# Altium PCB PCB1.PcbDoc
Units mm, origin at the board's own origin, x right, y up, seen from the top; angles counter-clockwise.
Board outline 99.95 x 99.82 mm, 2 copper layers (Top Layer, Bottom Layer); 7 components, 17 nets, 86 pads, 10 vias.
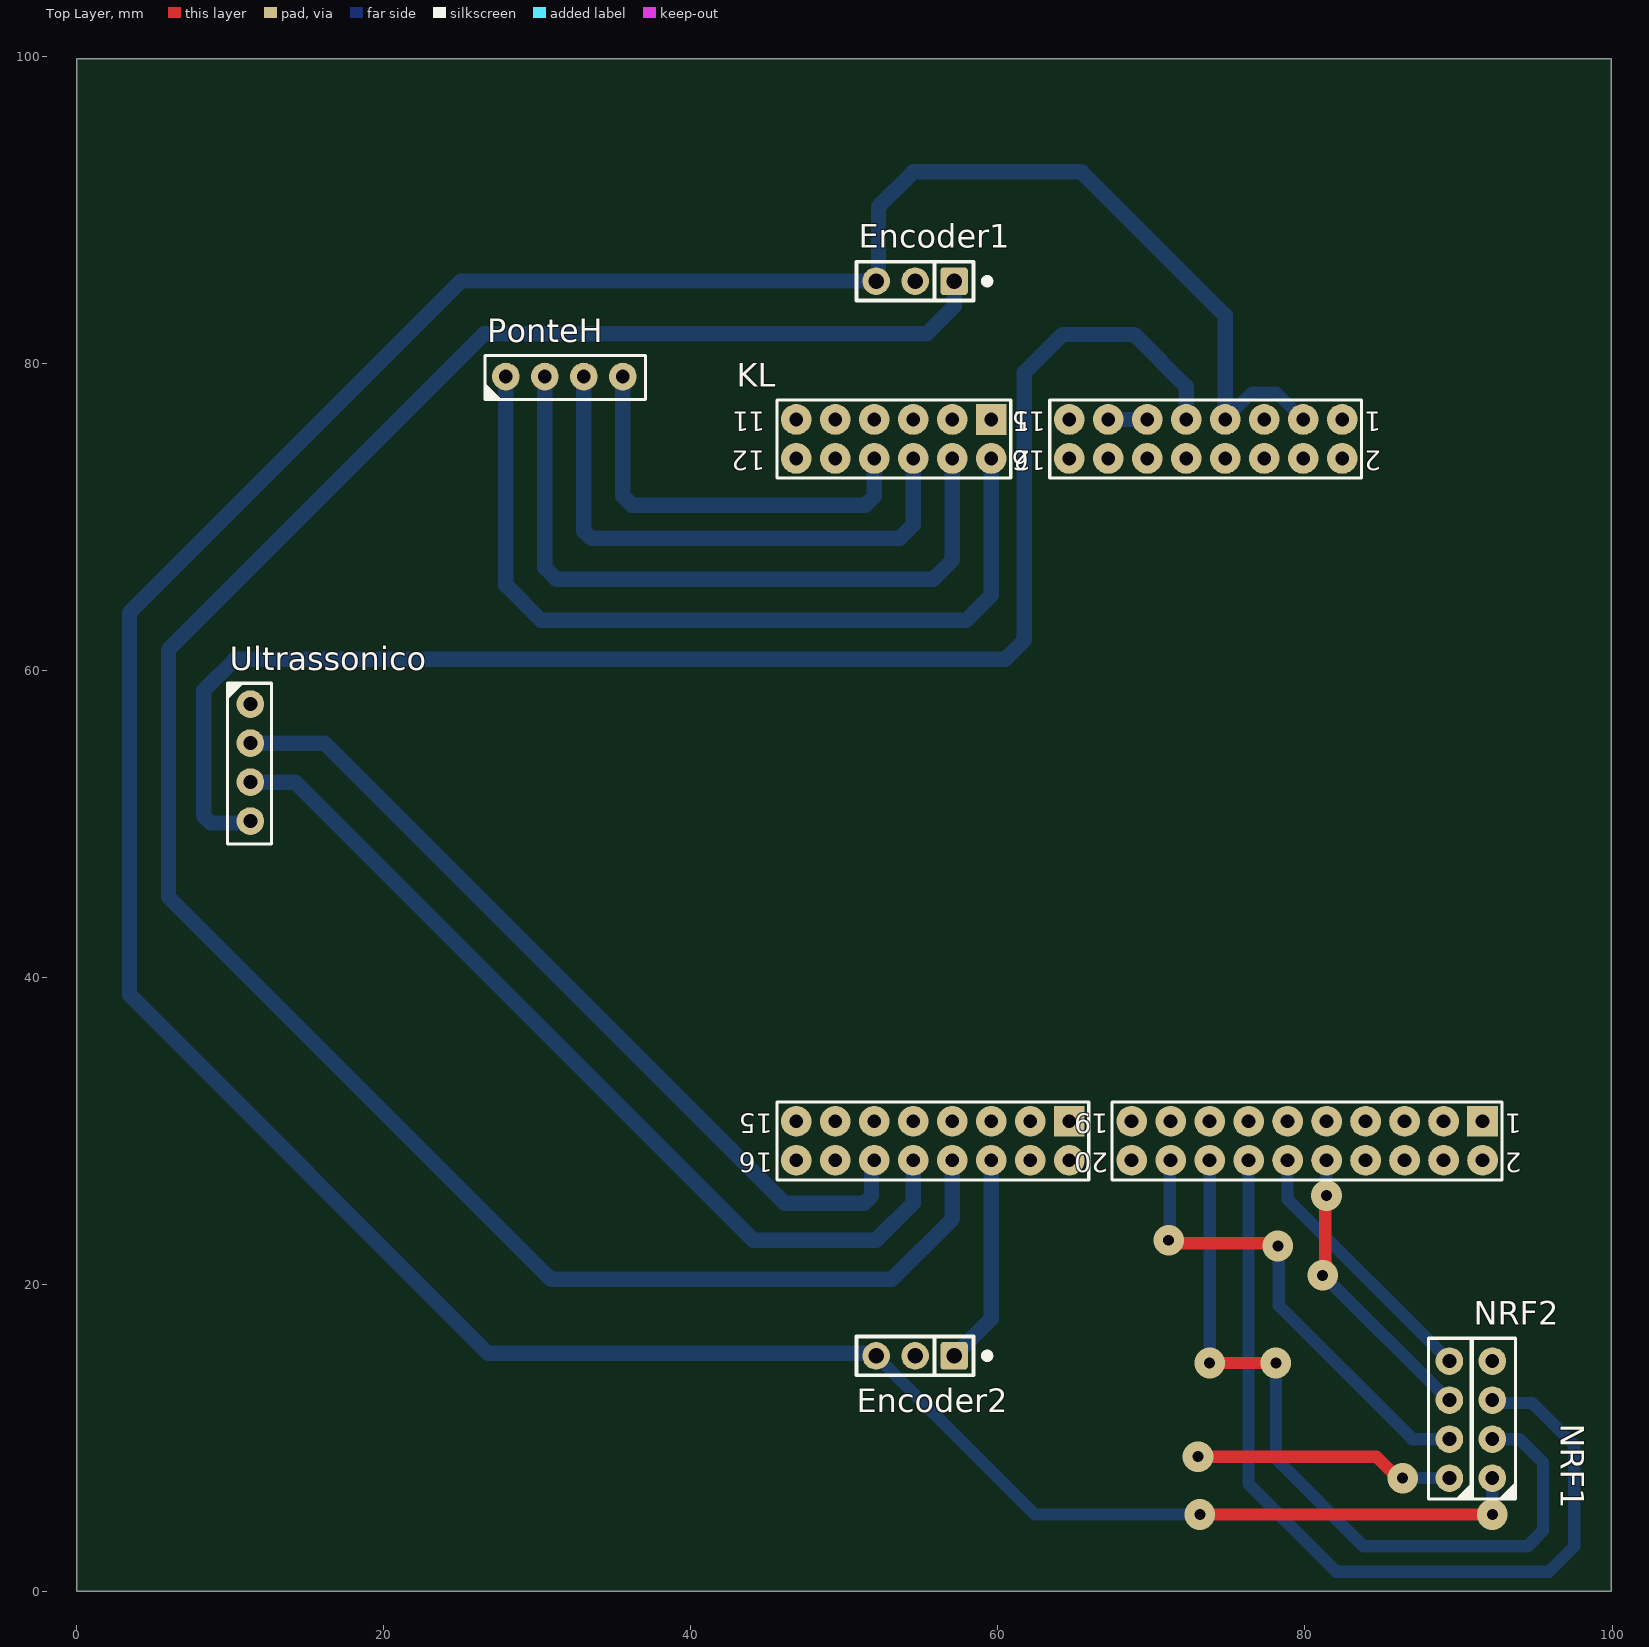
[diagram p0: Top Layer view]
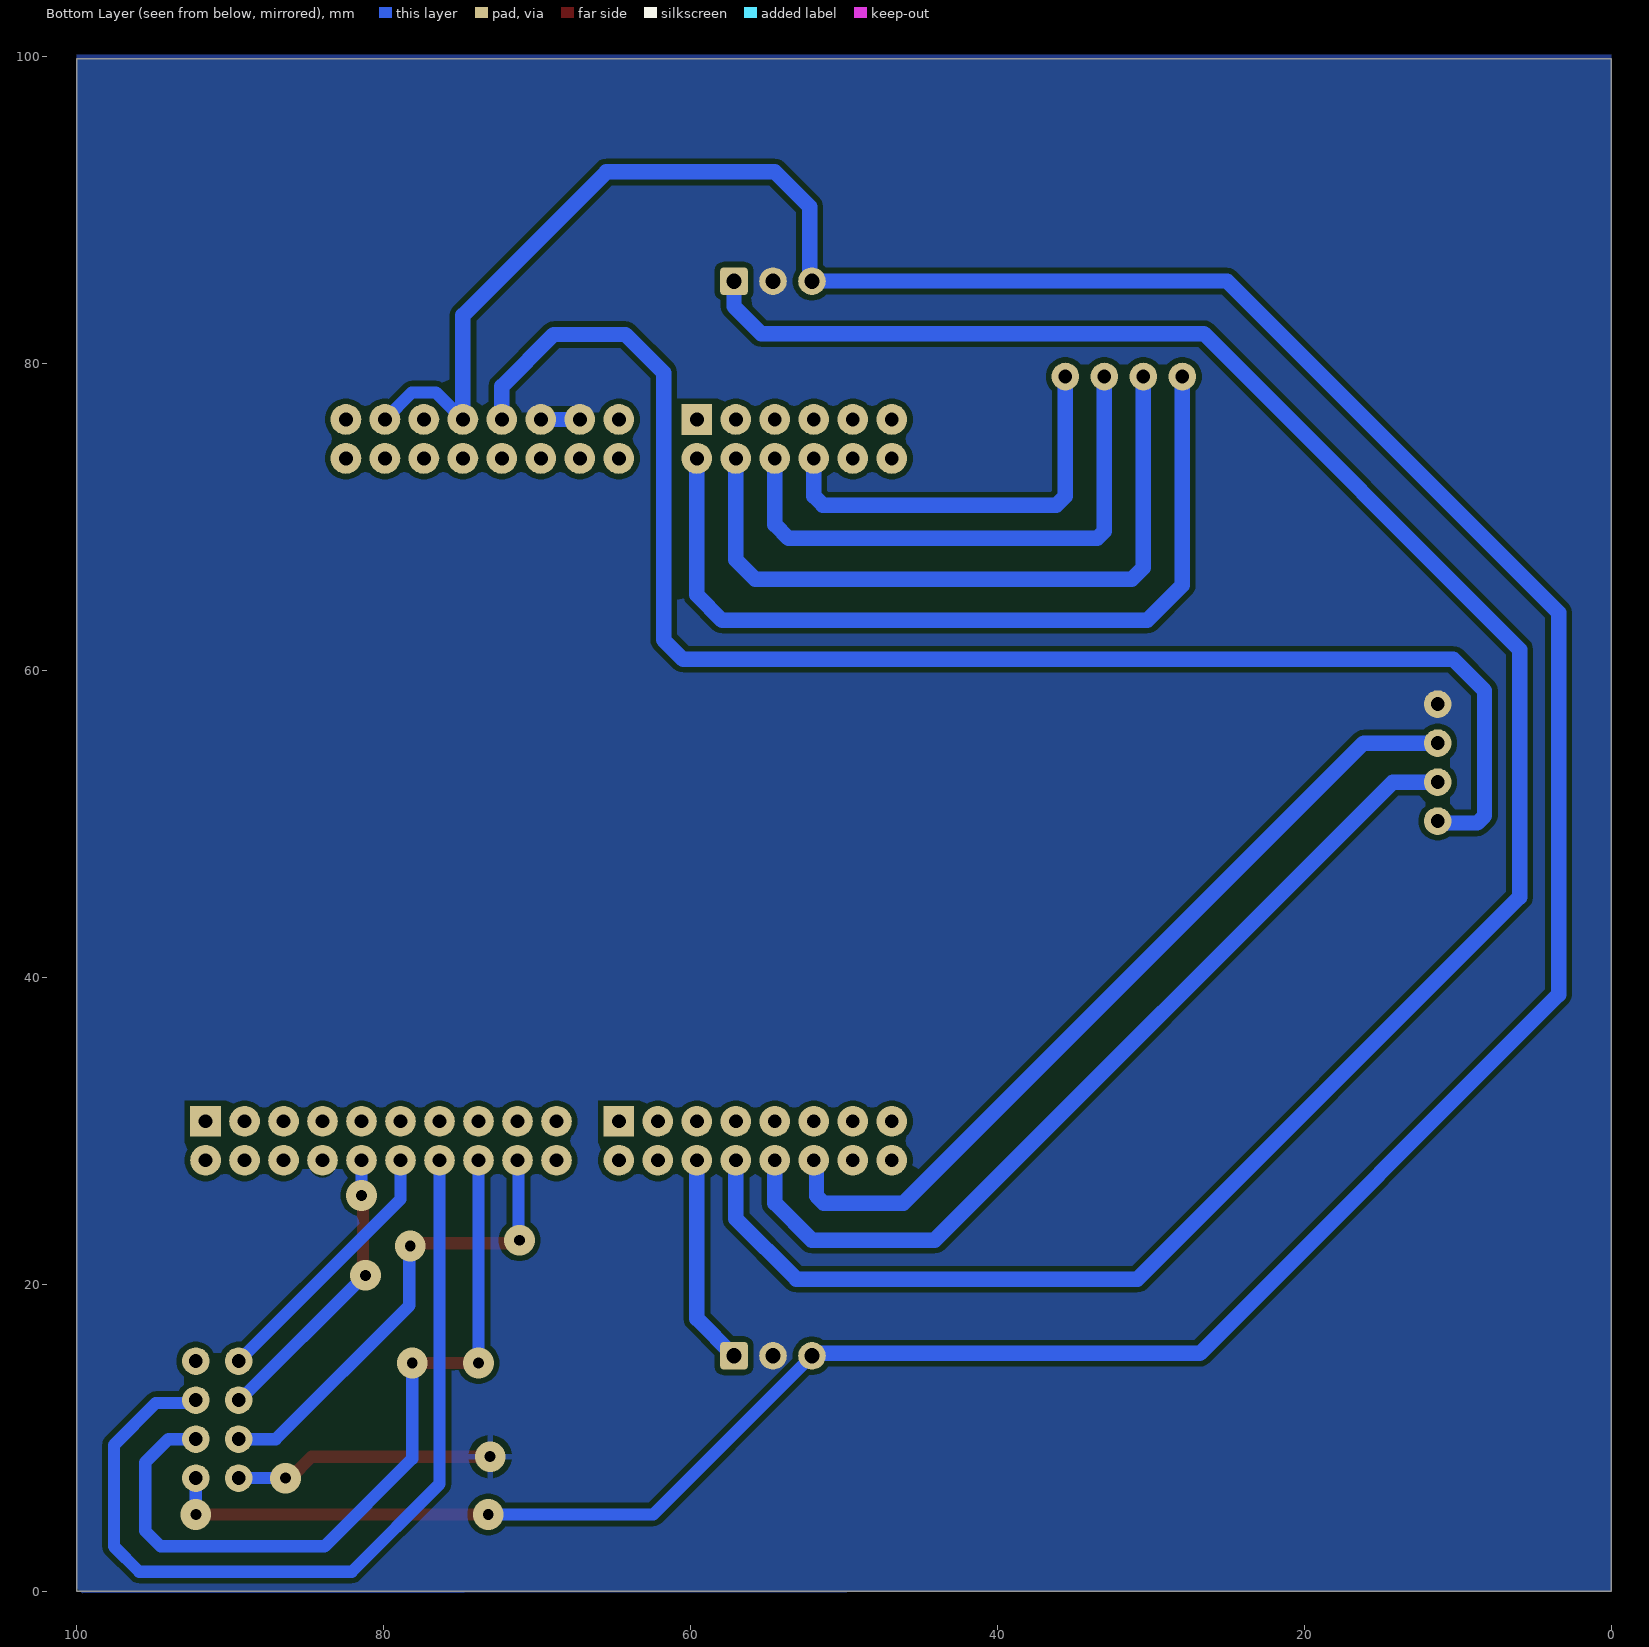
[diagram p1: Bottom Layer view, seen from below]
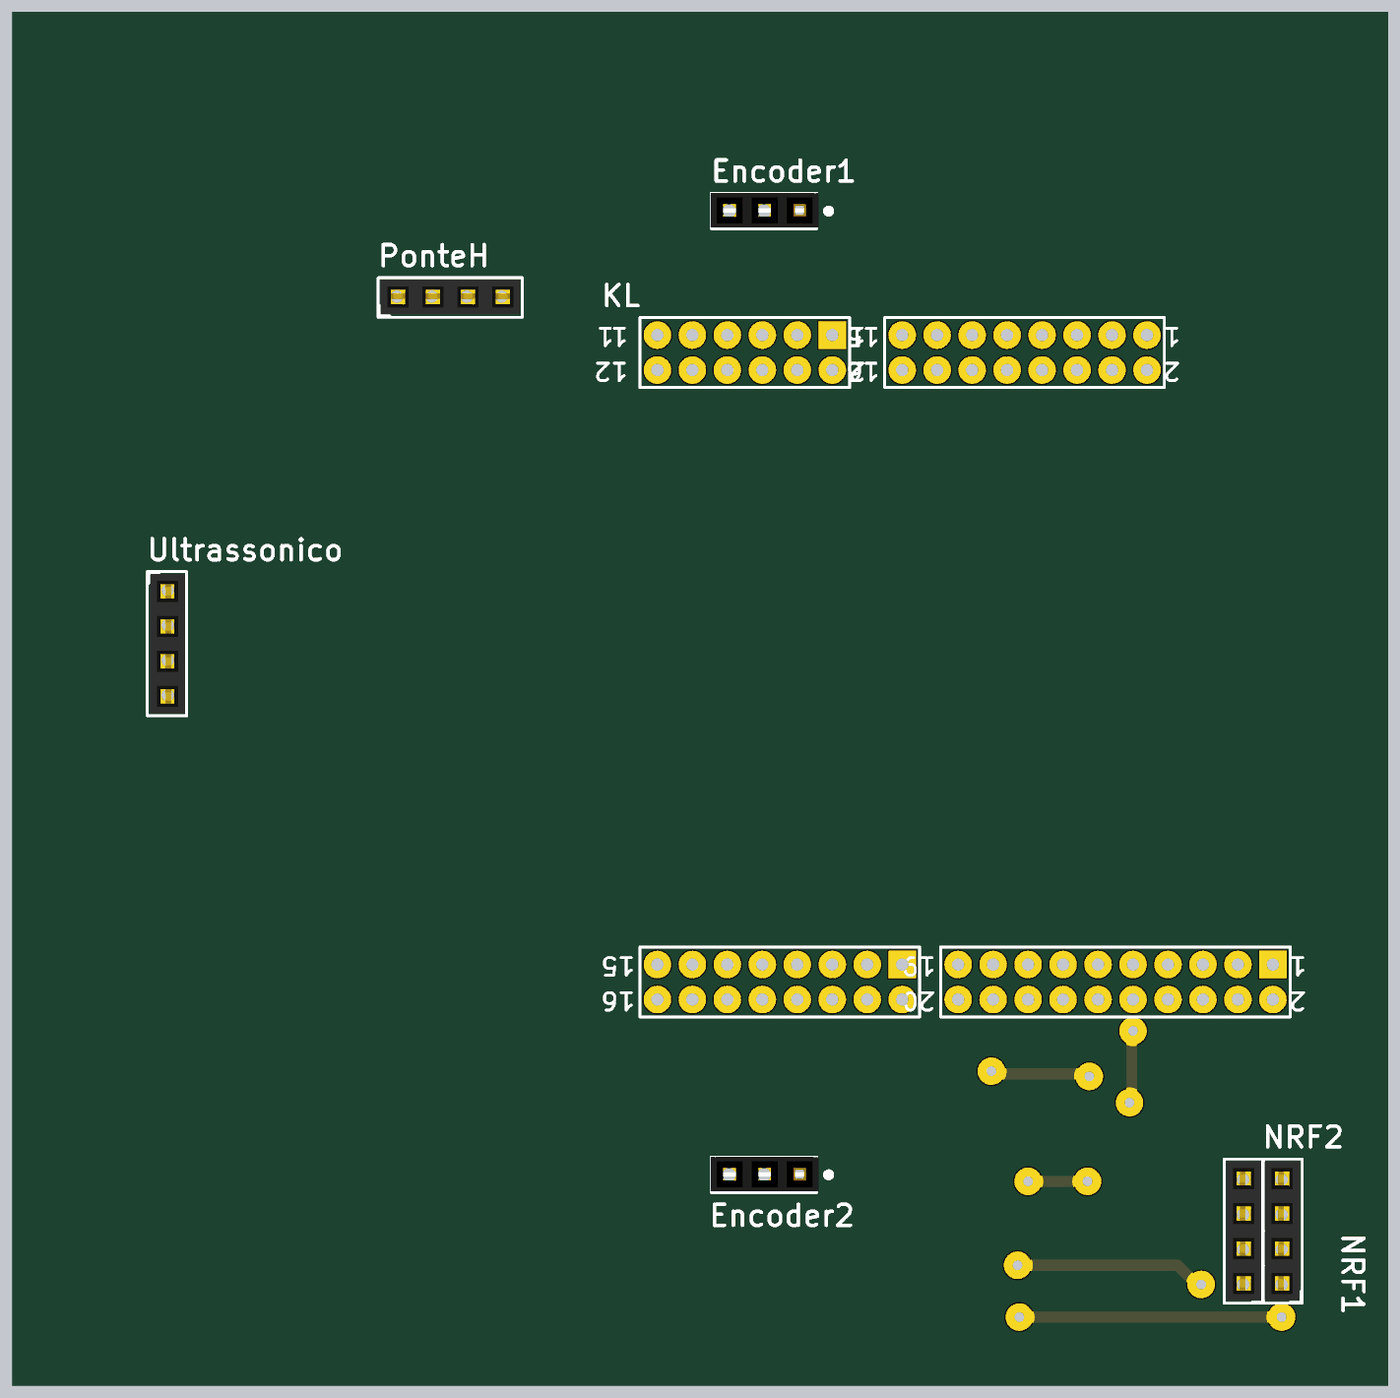
[diagram p2: 3D render of the assembled board from above, using the file's embedded part models]

## Layer stack, top to bottom
Top Solder: solder mask 0.0102, Solder Resist, Dk 3.5
Top Layer: signal copper 0.0356
Dielectric 1: dielectric 0.32, FR-4, Dk 4.8
Bottom Layer: signal copper 0.0356
Bottom Solder: solder mask 0.0102, Solder Resist, Dk 3.5

## Board outline
0,0 99.949,0 99.949,99.822 0,99.822

## Design rules (kind name [scope] priority, off if disabled: settings)
Clearance [All] p1: gap=0.35 ignorepadtopadclearanceinfootprint=FALSE except(0: Arc-Text Arc-Hole Track-Text Track-Hole SMDPad-Text SMDPad-Hole THPad-Text THPad-Hole Via-Text Via-Hole Fill-Text Fill-Hole Poly-Text Poly-Hole Region-Text Region-Hole Text-Text Text-Hole; 0.7: Arc-Arc Arc-Track Track-Track)
ComponentClearance [All] p1: gap=0.3 collisioncheckmode=3 verticalgap=0.254 showdistances=FALSE
HoleSize HoleSize_1 [All] p1: absolutevalues=TRUE maxlimit=1 minlimit=0.6 maxpercent=80.000 minpercent=20.000
HoleToHoleClearance [All] p1: gap=0.1 allowstackedmicrovias=TRUE
MinimumSolderMaskSliver [All] p1: minsoldermaskwidth=0.05
PolygonConnect [All] p1: connectstyle=Relief reliefconductorwidth=0.4 reliefentries=4 polygonreliefangle="90 Angle" airgapwidth=0.4
RoutingVias [All] p1: holewidth=0.9 width=2 viastyle="Through Hole" minholewidth=0.9 minwidth=2 maxholewidth=0.9 maxwidth=2
SilkToSilkClearance [All] p1: silktosilkclearance=0
SilkToSolderMaskClearance [IsPad] p1: minsilkscreentomaskgap=0 clearancetoexposedcopper=TRUE
SolderMaskExpansion [All] p1: expansion=0.102 istentingtop=FALSE
SupplyNets "Schematic Supply Nets" [InNet('GND')] p1: voltage=0.000
Width [All] p1: maxlimit=1.2 minlimit=0.5 preferedwidth=0.8 minimp=50.000000 maximp=50.000000 favimp=50.000000
24 further rules are at their usual default settings.

## Components (designator, comment, footprint, x,y, rotation, side; value= is the part's Value field where it differs from the comment)
Encoder1 "Header 1x3" "HDR FEMALE 1x3" 57.145,85.333 r180 top
Encoder2 "Header 1x3" "HDR FEMALE 1x3" 57.145,15.333 r180 top
KL "KL25Z Shield*" "Freedom KL25Z Headerarray" 69.202,52.21 r270 top
NRF1 "Header Female 1x4" "HDR FEMALE 1x4" 89.408,11.176 r90 top
NRF2 "Header Female 1x4" "HDR FEMALE 1x4" 92.202,11.176 r90 top
PonteH "Header Female 1x4" "HDR FEMALE 1x4" 31.75,79.121 r0 top
Ultrassonico "Header Female 1x4" "HDR FEMALE 1x4" 11.303,53.975 r270 top

## Footprints (in the part's own frame and the unit in brackets; to place one, negate y for a bottom-side part, rotate by r counter-clockwise, add the part's x,y. Pads: shape width x height; smd on the part's side, far side on the other; paste and mask are expansions set on the pad)
"Freedom KL25Z Headerarray" [mm] "Headerarray KL25Z Shield"
  round 2 hole 0.9: GND(-24.117,-2.019) GND(-24.117,0.521) GND(24.143,14.745) NC(21.603,17.285) P3V3(-24.117,10.681) P3V3(-24.117,5.601) P5-9V_VIN(-24.117,-4.559) P5V_USB(-24.117,3.061) PTA1(24.143,-22.339) PTA2(24.143,-19.799) PTA4(24.143,-12.179) PTA5(24.143,-9.639) PTA12(24.143,-14.719) PTA13(24.143,-0.495) PTA16(21.603,9.665) PTA17(21.603,12.205) PTB1(-24.117,-12.179) PTB2(-24.117,-14.719) PTB3(-24.117,-17.259) PTB8(-21.577,13.221) PTB9(-21.577,10.681) PTB10(-21.577,8.141) PTB11(-21.577,5.601) PTC0(21.603,-22.339) PTC0(21.603,-19.799) PTC1(-24.117,-22.339) PTC2(-24.117,-19.799) PTC3(21.603,-17.259) PTC4(21.603,-14.719) PTC5(21.603,-12.179) PTC6(21.603,-9.639) PTC8(24.143,-7.099) PTC9(24.143,-4.559) PTC10(21.603,-7.099) PTC12(21.603,-0.495) PTC13(21.603,2.045) PTC16(21.603,4.585) PTC17(21.603,7.125) PTD0(24.143,4.585) PTD1(24.143,12.205) PTD2(24.143,7.125) PTD3(24.143,9.665) PTD4(24.143,-17.259) PTD5(24.143,2.045) PTD6(21.603,19.825) PTE0(24.143,19.825) PTE1(24.143,22.365) PTE2(-21.577,3.061) PTE3(-21.577,0.521) PTE4(-21.577,-2.019) PTE5(-21.577,-4.559) PTE20(-21.577,-9.639) PTE21(-21.577,-12.179) PTE22(-21.577,-14.719) PTE23(-21.577,-17.259) PTE29(-21.577,-19.799) PTE30(-21.577,-22.339) PTE31(21.603,14.745) RESET(-24.117,8.141) SDA_PTD5(-24.117,13.221) VREFH(24.143,17.285)
  rect 2x2 hole 0.9: PTB0(-24.117,-9.639) PTC11(21.603,-4.559) PTD7(21.603,22.365)
  silkscreen extent -25.39,-23.61 25.41,23.63
"HDR FEMALE 1x3" [mm] "PinHeader 1x3 TH Pitch 2.54mm"
  rrect25% 1.8x1.8 hole 1: 1(0,0)
  round 1.8 hole 1: 2(2.54,0) 3(5.08,0)
  silkscreen extent -2.3,-1.27 6.35,1.27, body extent -1.44,-1.3 6.44,1.2, height 8.5
"HDR FEMALE 1x4" [mm] "Connector; Header; 4 Position"
  round 1.8 hole 0.9: 1(-3.81,0) 2(-1.27,0) 3(1.27,0) 4(3.81,0)
  silkscreen extent -5.17,-1.5 5.3,1.37, body extent -5,-1.3 5.16,1.24, height 8.5

## Part data
Encoder1 Encoder2: "Headers & Wire Housings 40Pin 2mm Spacing Single Row Hdrs, 5pc", Manufacturer=Cromax, Manufacturer Part Number=IMP10327, Supplier Part Number 1="Barra de Pinos Simples 1x40 Macho BMO40-1E", Accessory Type=-, Brand=Cromax, Category="Headers & Wire Housings", ComponentLink1Description=http://loja.multcomercial.com.br/barra-de-pinos-simples-1x40-macho-bmo40-1e.html, ComponentLink1URL=http://loja.multcomercial.com.br/barra-de-pinos-simples-1x40-macho-bmo40-1e.html, Contact Gender="Pin (Male)", Contact Plating=Gold, Contact Type=-, Minimum Order Quantity=1, Mounting Angle=Vertical, Mounting Style="Straight Pin", Number of Positions="40 Position", Number of Rows="1 Row", Pitch="2 mm", Pricing 1="1=1.00, 5=0.20 (BRL)", Product=Headers, Product Category=Accessories, Reeling=False, RoHS="RoHS Compliant", RoHS - Mouser=Y, Row Spacing=-, Stock 1=14, Supplier 1="Mult Comercial", Termination Style="Through Hole", Type=Breakaway
KL: library part "Freedom KL25Z Header", "FRDM KL25Z Shield"
NRF1 NRF2 PonteH Ultrassonico: "Headers & Wire Housings 40Pin 2mm Spacing Single Row Hdrs, 5pc", Manufacturer=Cromax, Manufacturer Part Number=-, Accessory Type=-, Brand=Cromax, Category="Headers & Wire Housings", ComponentLink1Description=-, ComponentLink1URL=-, Contact Gender="Pin (Female)", Contact Plating=Gold, Contact Type=-, Minimum Order Quantity=1, Mounting Angle=Vertical, Mounting Style="Straight Pin", Number of Positions="40 Position", Number of Rows="1 Row", Pitch="2 mm", Pricing 1="1=1.60, 5=0.32 (BRL)", Product=Headers, Product Category=Accessories, Reeling=False, RoHS="RoHS Compliant", RoHS - Mouser=Y, Row Spacing=-, Stock 1=14, Supplier 1=-, Supplier Part Number 1=-, Termination Style="Through Hole", Type=Breakaway

## Via types
v1: diameter 2, hole 0.711, Top Layer to Bottom Layer, 10 vias

## Nets (pads, with @x,y where several pads share a name; then routed paths per layer and width w, separated by ;. In a path a pad name is that pad's centre, name@x,y a point inside that pad or via, vN(x,y) a via of type N, cw(c..) or ccw(c..) an arc to the next point about the centre after c; other vN are vias at no path point)
CE: KL.PTD5 NRF1.2 | length 31.1
  Top Layer w0.8: v1(71.12,22.86) 71.31,22.669 78.041,22.669 v1(78.232,22.479)
  Bottom Layer w0.8: v1(71.12,22.86) 71.183,22.924 71.183,28.004 KL.PTD5 ; v1(78.232,22.479) 78.289,22.422 78.289,18.612 86.995,9.906 NRF1.2
CS: KL.PTD0 NRF2.2 | length 52.3
  Top Layer w0.8: v1(73.787,14.859) v1(78.105,14.859)
  Bottom Layer w0.8: v1(73.787,14.859) KL.PTD0 ; v1(78.105,14.859) 78.105,8.636 83.82,2.921 94.488,2.921 95.504,3.937 95.504,8.382 93.98,9.906 NRF2.2
Encoder1: Encoder1.1 KL.PTA4 | length 145
  Bottom Layer w1: KL.PTA4 57.023,24.257 53.086,20.32 30.861,20.32 5.969,45.212 5.969,61.341 26.543,81.915 55.372,81.915 57.145,83.688 Encoder1.1
Encoder2: Encoder2.1 KL.PTA5 | length 13.7
  Bottom Layer w1: Encoder2.1 59.563,17.751 KL.PTA5
GND: Encoder1.2 Encoder2.2 KL.GND NRF1.1 Ultrassonico.1 | length 20
  Top Layer w0.8: Encoder1.2 Encoder1.2@54.605,85.522 ; v1(73.025,8.763) 84.646,8.763 86.043,7.366 v1(86.36,7.366)
  Bottom Layer w0.8: v1(86.36,7.366) NRF1.1
  Bottom Layer w1: KL.GND@67.183,76.327 KL.GND@69.723,76.327 ; KL.GND@83.947,27.796 KL.GND@83.947,28.067
IN1: KL.PTE20 PonteH.1 | length 55.7
  Bottom Layer w1: PonteH.1 27.94,65.532 30.226,63.246 57.912,63.246 59.563,64.897 KL.PTE20
IN2: KL.PTE21 PonteH.2 | length 46.4
  Bottom Layer w1: PonteH.2 30.48,66.675 31.242,65.913 55.753,65.913 57.023,67.183 KL.PTE21
IN3: KL.PTE22 PonteH.3 | length 36.4
  Bottom Layer w1: PonteH.3 33.02,69.049 33.489,68.58 53.594,68.58 54.483,69.469 KL.PTE22
IN4: KL.PTE23 PonteH.4 | length 27.1
  Bottom Layer w1: PonteH.4 35.56,71.325 36.146,70.739 51.357,70.739 51.943,71.325 KL.PTE23
IRQ: NRF2.4
MISO: KL.PTD3 NRF1.4 | length 17.4
  Bottom Layer w0.8: KL.PTD3 78.867,25.527 NRF1.4
MOSI: KL.PTD2 NRF2.3 | length 58.5
  Bottom Layer w0.8: KL.PTD2 76.327,6.985 82.042,1.27 95.885,1.27 97.536,2.921 97.536,9.525 94.806,12.255 92.393,12.255 NRF2.3
NetKL_9: KL.P5V_USB Ultrassonico.4 | length 98.3
  Bottom Layer w1: Ultrassonico.4@10.852,50.038 8.724,50.038 8.255,50.507 8.255,58.674 10.287,60.706 60.452,60.706 61.722,61.976 61.722,79.375 64.207,81.86 68.889,81.86 72.263,78.486 KL.P5V_USB
NetKL_58: KL.PTA12 Ultrassonico.3 | length 59.3
  Bottom Layer w1: Ultrassonico.3 14.224,52.705 44.069,22.86 52.07,22.86 54.483,25.273 KL.PTA12
NetKL_60: KL.PTD4 Ultrassonico.2 | length 55.5
  Bottom Layer w1: Ultrassonico.2 16.129,55.245 46.101,25.273 51.298,25.273 51.767,25.742 51.767,27.891 KL.PTD4
SCK: KL.PTD1 NRF1.3 | length 19.2
  Top Layer w0.8: v1(81.153,20.574) 81.317,20.738 81.317,25.691 v1(81.407,25.781)
  Bottom Layer w0.8: v1(81.153,20.574) 81.216,20.574 89.344,12.446 NRF1.3 ; v1(81.407,25.781) KL.PTD1
VccEncoder: Encoder1.3 Encoder2.3 KL.P3V3 NRF2.1 | length 232.7
  Top Layer w0.8: v1(73.152,5) v1(92.202,5)
  Bottom Layer w0.8: Encoder2.3 62.398,5 v1(73.152,5) ; KL.P3V3@74.803,76.327 76.553,78.077 78.133,78.077 KL.P3V3@79.883,76.327 ; v1@92.202,5.08 NRF2.1
  Bottom Layer w1: Encoder2.3@51.689,15.494 26.797,15.494 3.429,38.862 3.429,63.754 25.019,85.344 52.054,85.344 Encoder1.3 ; Encoder1.3@52.065,85.344 52.218,85.497 52.218,90.191 54.483,92.456 65.456,92.456 74.803,83.109 KL.P3V3@74.803,76.327
pads on no net: KL.NC KL.P5-9V_VIN KL.PTA1 KL.PTA2 KL.PTA13 KL.PTA16 KL.PTA17 KL.PTB0 KL.PTB1 KL.PTB2 KL.PTB3 KL.PTB8 KL.PTB9 KL.PTB10 KL.PTB11 KL.PTC0 KL.PTC1 KL.PTC2 KL.PTC3 KL.PTC4 KL.PTC5 KL.PTC6 KL.PTC8 KL.PTC9 KL.PTC10 KL.PTC11 KL.PTC12 KL.PTC13 KL.PTC16 KL.PTC17 KL.PTD6 KL.PTD7 KL.PTE0 KL.PTE1 KL.PTE2 KL.PTE3 KL.PTE4 KL.PTE5 KL.PTE29 KL.PTE30 KL.PTE31 KL.RESET KL.SDA_PTD5 KL.VREFH

## Polygon pours and split planes (outlines as drawn)
GND on Bottom Layer "GND_L02_P005" (solid, pour order 5): 99.949,100.076 0,100.076 0,0 99.949,-0.127

## Text inside footprints (layer, text, board x,y; h text height)
KL: Top Overlay "2" at 62.103,74.295 h1.27 r180; Top Overlay "1" at 62.103,76.835 h1.27 r180; Top Overlay "1" at 44.831,76.835 h1.27 r180; Top Overlay "1" at 43.815,76.835 h1.27 r180; Top Overlay "12" at 44.831,74.295 h1.27 r180; Top Overlay "16" at 63.119,74.295 h1.27 r180; Top Overlay "15" at 63.119,76.835 h1.27 r180; Top Overlay "1" at 84.963,76.835 h1.27 r180; Top Overlay "2" at 84.963,74.295 h1.27 r180; Top Overlay "16" at 45.339,28.575 h1.27 r180; Top Overlay "15" at 45.339,31.115 h1.27 r180; Top Overlay "1" at 67.183,31.115 h1.27 r180; Top Overlay "2" at 67.183,28.575 h1.27 r180; Top Overlay "2" at 94.107,28.575 h1.27 r180; Top Overlay "1" at 94.107,31.115 h1.27 r180; Top Overlay "19" at 67.183,31.115 h1.27 r180; Top Overlay "20" at 67.183,28.575 h1.27 r180
NRF1: Mechanical 29 "1" at 90.551,8.382 h0.5 r90
NRF2: Mechanical 29 "1" at 93.345,8.382 h0.5 r90
PonteH: Mechanical 29 "1" at 28.956,77.978 h0.5
Ultrassonico: Mechanical 29 "1" at 10.16,56.769 h0.5 r270